# EAGLE board clap (EAGLE 6.5.0)
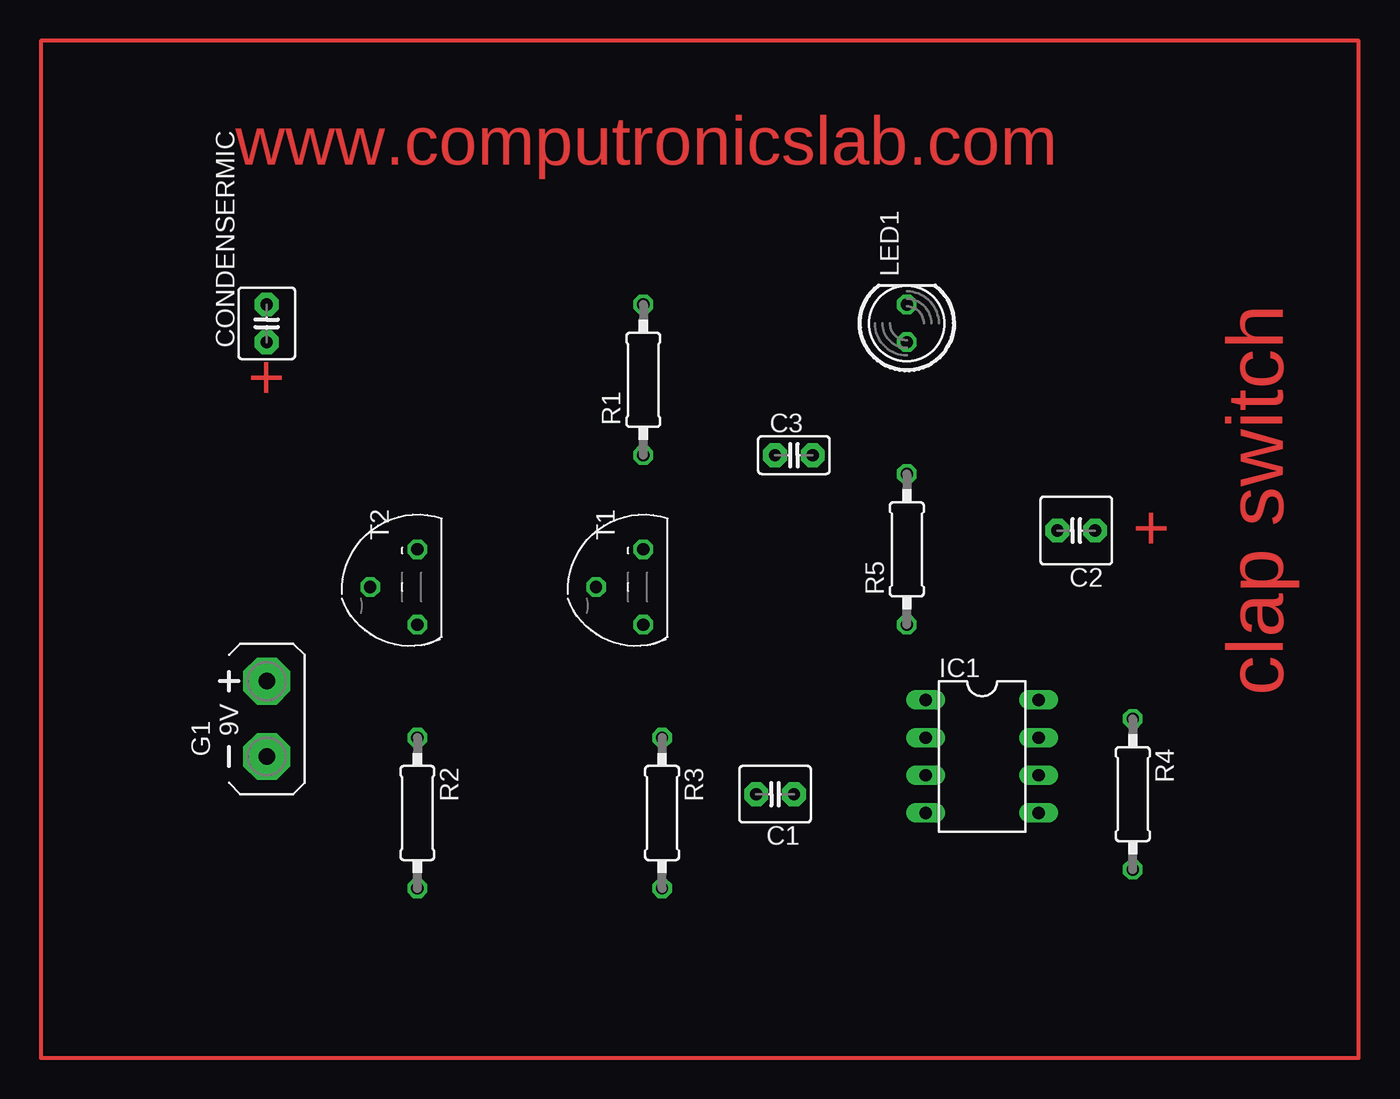
[diagram p0: board, top side]
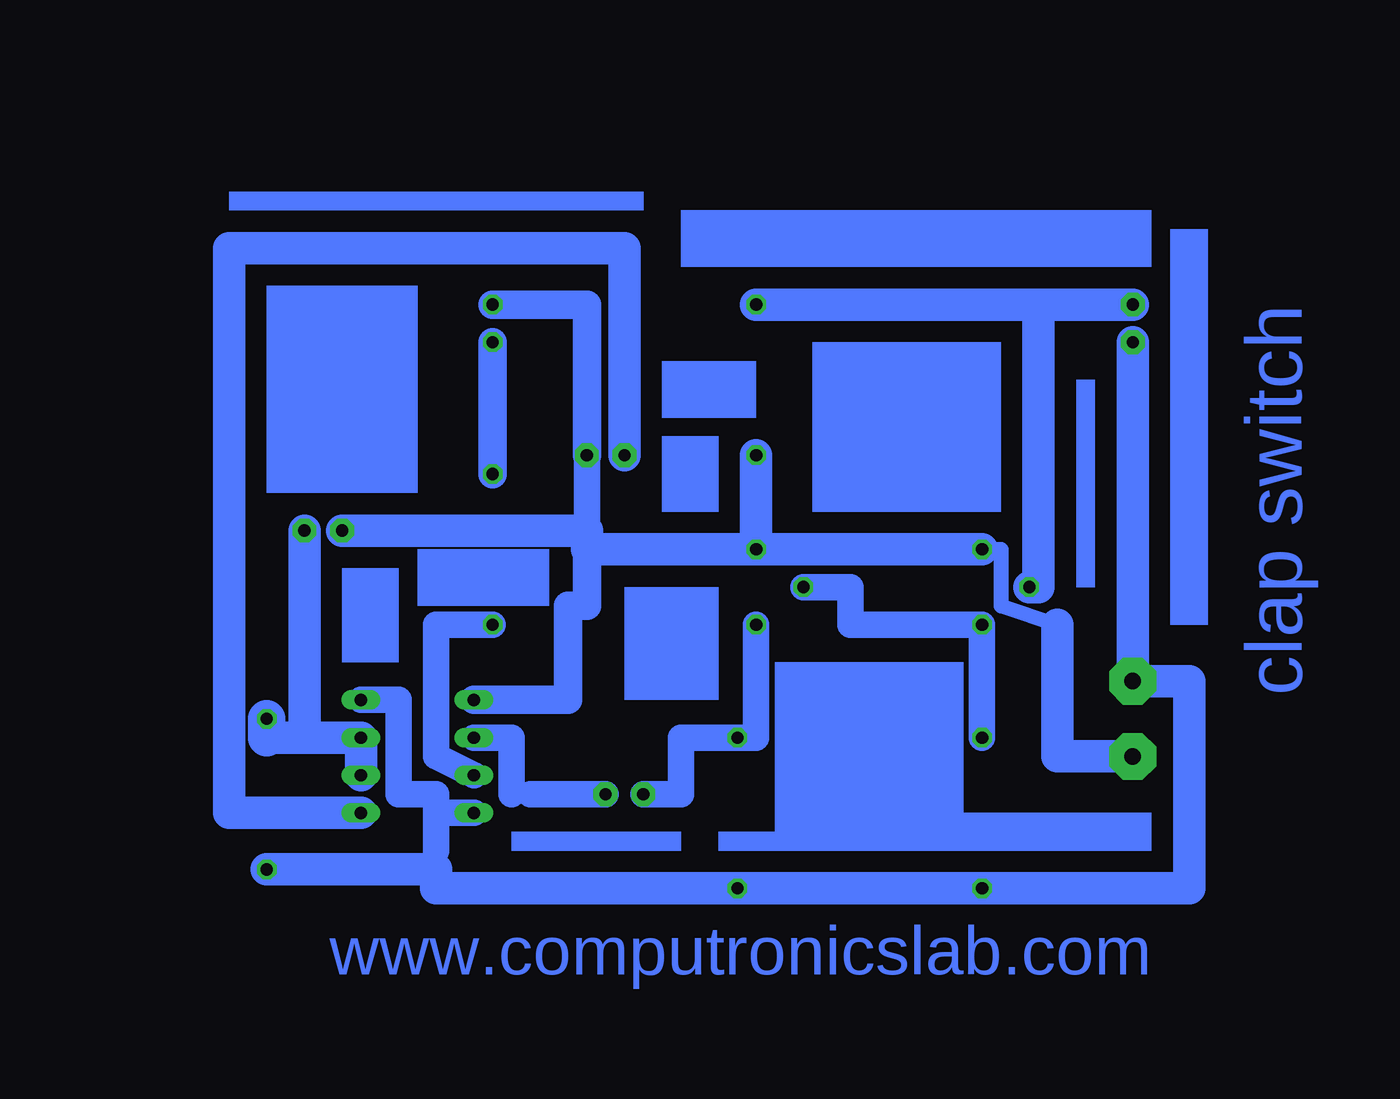
[diagram p1: board, bottom side, seen from below]

No outline drawn. Coordinates in mm, seen from the top.
Copper layers (1*16): Top 0.035mm / dielectric 1.5mm / Bottom 0.035mm
Design rules "default": minimum track width 10mil, minimum drill 24mil, track to track 8mil, track to pad 8mil, pad to pad 8mil, via to via 8mil, smd to smd 8mil, copper to edge 40mil, drill to drill 8mil, minimum pad ring 10mil, minimum via ring 8mil, stop-mask expansion 4mil, vias tented up to drill 0mil, thermal gap 10mil

## Footprints (pad centres in the part's own frame; a part is rotated, then mirrored left to right if it is on the bottom)
C2.5-4 = drill 0.813 pad 1.6 octagon: 1 -1.27,0; 2 1.27,0
C2.5-5 = drill 0.813 pad 1.6 octagon: 1 -1.27,0; 2 1.27,0
C2.5-2 = drill 0.813 pad 1.6 octagon: 1 -1.27,0; 2 1.27,0
AB9V = drill 1.118 pad 3.15 octagon: + 0,2.54; - 0,-2.54
DIL-08 = drill 0.813 long: 1 -3.81,-3.81; 2 -1.27,-3.81; 3 1.27,-3.81; 4 3.81,-3.81; 5 3.81,3.81; 6 1.27,3.81; 7 -1.27,3.81; 8 -3.81,3.81
LED5MM = drill 0.813 octagon: A -1.27,0; K 1.27,0
0207/10 = drill 0.813 octagon: 1 -5.08,0; 2 5.08,0
TO92 = drill 0.813 octagon: 1 2.54,-1.27; 2 0,1.905; 3 -2.54,-1.27

## Placement (x,y rotation side)
C1  104 (.1uf)  [C2.5-4]  45.72,33.02 180 top
C2  100uf  [C2.5-5]  66.04,50.8 180 top
C3  104  [C2.5-2]  46.99,55.88 0 top
CONDENSERMIC  [C2.5-4]  11.43,64.77 90 top
G1  AB9V  [AB9V]  11.43,38.1 0 top
IC1  NE555  [DIL-08]  59.69,35.56 270 top
LED1  5MM  [LED5MM]  54.61,64.77 90 top
R1  4.7k  [0207/10]  36.83,60.96 90 top
R2  1k  [0207/10]  21.59,31.75 270 top
R3  470k  [0207/10]  38.1,31.75 270 top
R4  47k  [0207/10]  69.85,33.02 270 top
R5  330 R  [0207/10]  54.61,49.53 90 top
T1  BC547  [TO92]  35.56,46.99 90 top
T2  BC547  [TO92]  20.32,46.99 90 top

## Library data of the parts
C1-C3 CONDENSERMIC = capacitor-wima
G1 = battery
IC1 = st-microelectronics; MF: Arrow Electronics; MPN: NE555N; OC_FARNELL: 1467742; OC_NEWARK: 89K1486
LED1 = led
R1-R5 = eagle-ltspice; SPICEMODEL: NONE; SPICEPREFIX: R
T1 T2 = transistor

## Nets
N$1: R2.1 T1.2 T2.3
N$2: C1.2 R3.1 T1.3
N$3: C2.1 IC1.6 IC1.7 R4.1
N$4: CONDENSERMIC.1 G1.+ IC1.4 IC1.8 R2.2 R3.2 R4.2
N$5: CONDENSERMIC.2 R1.2 T2.2
N$6: C3.1 IC1.5
N$7: LED1.A R5.2
N$8: C2.2 C3.2 G1.- IC1.1 LED1.K R1.1 T1.1 T2.1
N$9: C1.1 IC1.2
N$10: IC1.3 R5.1

## Tracks (layer width: path | path; a pad name or v marks a point on that pad's centre or on a via)
N$1
  Bottom 1.778: R2.1 T2.3 30.48,44.45 30.48,46.99 33.02,46.99 T1.2
N$2
  Bottom 1.778: C1.2 41.91,33.02 41.91,36.83 R3.1 36.83,36.83 T1.3
N$3
  Bottom 2.184: IC1.6 IC1.7 67.31,36.83 | 67.31,36.83 69.85,36.83 | 67.31,36.83 C2.1
  Bottom 2.54: 69.85,36.83 R4.1
N$4
  Bottom 0.254: 58.42,31.75 58.42,27.94 58.42,26.67
  Bottom 1.778: IC1.8 60.96,39.37 60.96,33.02 58.42,33.02 58.42,31.75 | 58.42,31.75 58.42,29.21 | IC1.4 58.42,31.75
  Bottom 2.184: CONDENSERMIC.1 G1.+ 7.62,40.64 7.62,26.67 R2.2 R3.2 58.42,26.67 | 58.42,27.94 R4.2
N$5
  Bottom 2.184: 17.78,66.04 17.78,46.99 T2.2 | CONDENSERMIC.2 17.78,66.04 | 17.78,66.04 R1.2
N$6
  Bottom 2.184: IC1.5 72.39,31.75 72.39,69.85 45.72,69.85 C3.1
N$7
  Bottom 1.93: LED1.A R5.2
N$8
  Bottom 1.016: 16.51,44.45 20.32,45.72 20.32,49.53 T2.1
  Bottom 1.778: 48.26,49.53 C3.2
  Bottom 1.93: C3.2 48.26,66.04 LED1.K | IC1.1 49.53,39.37 49.53,45.72 48.26,45.72 48.26,46.99 48.26,49.53 48.26,50.8
  Bottom 2.184: T1.1 T2.1 | T1.1 48.26,49.53 | T1.1 R1.1 | 48.26,50.8 C2.2 | 16.51,44.45 16.51,35.56 G1.-
N$9
  Bottom 0.254: 52.07,33.02 53.34,33.02
  Bottom 1.778: 53.34,33.02 53.34,35.56 53.34,36.83 IC1.2 | C1.1 52.07,33.02
N$10
  Bottom 1.778: IC1.3 58.42,35.56 58.42,44.45 R5.1
N$11
  Top 0.254: -3.81,83.82 -3.81,15.24 85.09,15.24 85.09,83.82 -3.81,83.82
(copper drawn outside any net)
  shapes: Bottom area x16

## Text on the board
Top: www.computronicslab.com | clap switch | + | +
Bottom: clap switch | www.computronicslab.com